# EAGLE board M0_Express_eh_shield (EAGLE 9.1.3)
REV: G
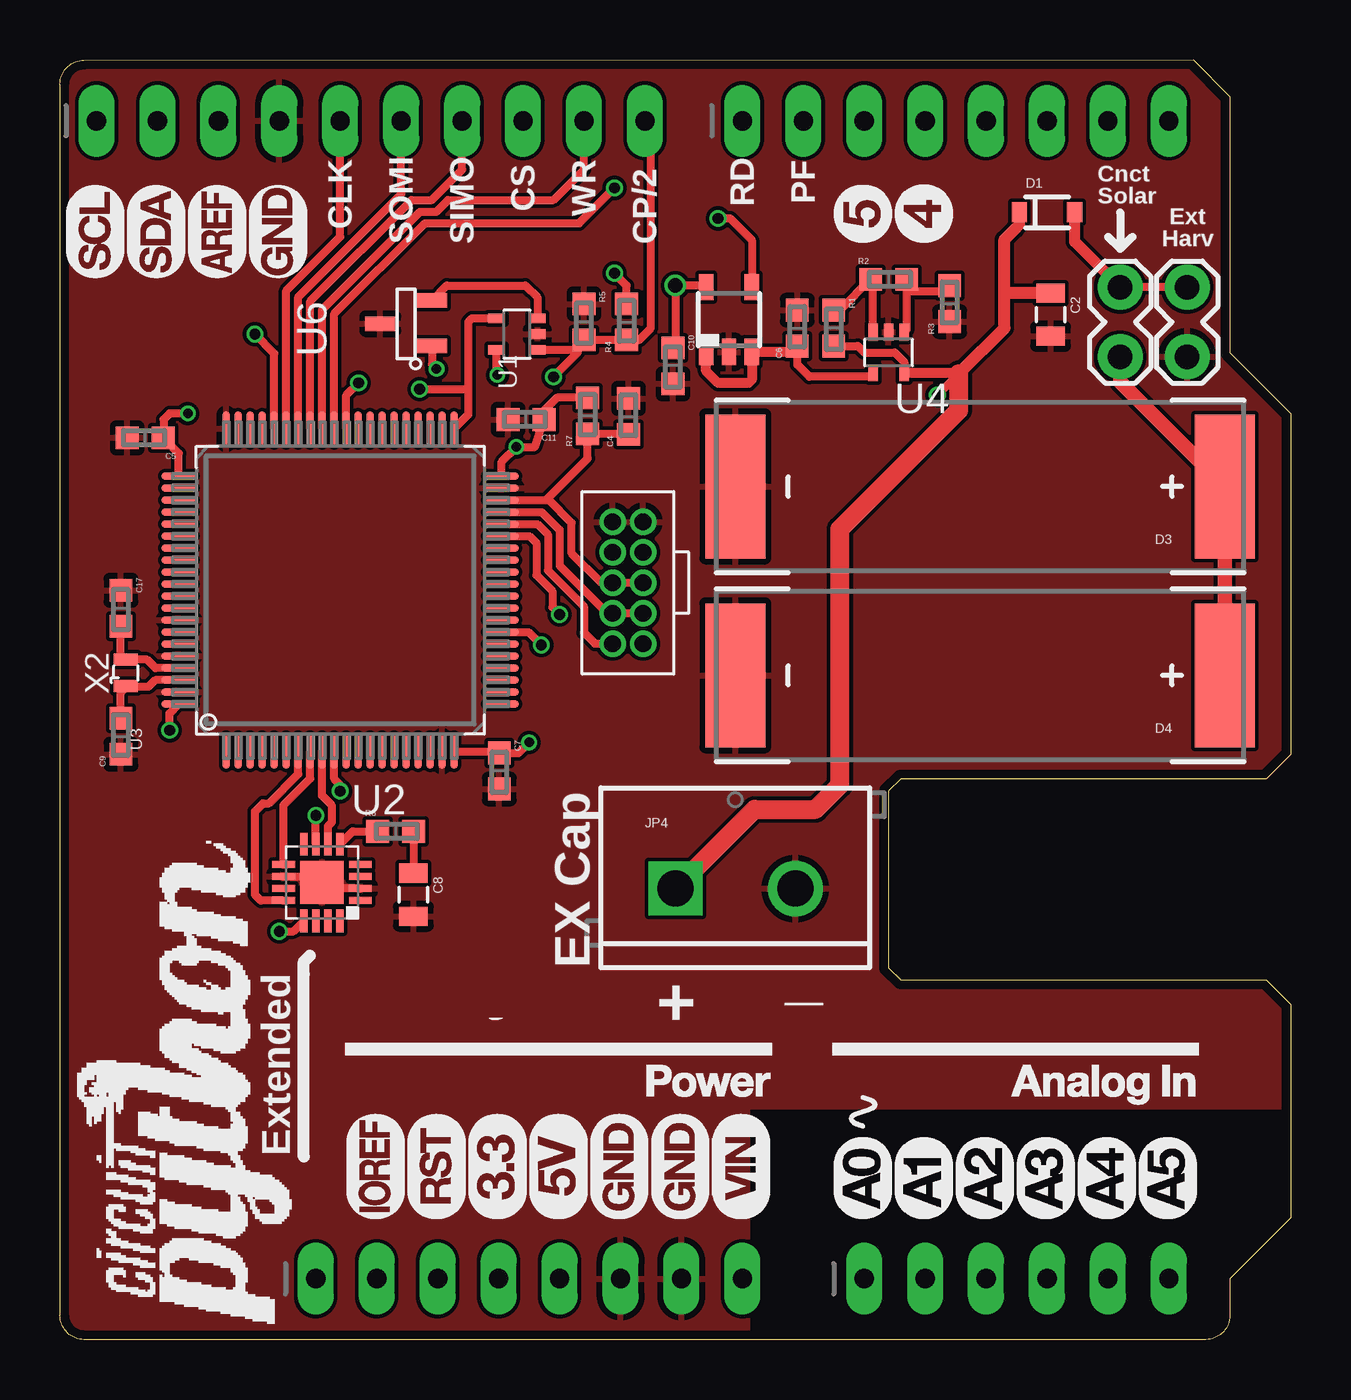
[diagram p0: board, top side]
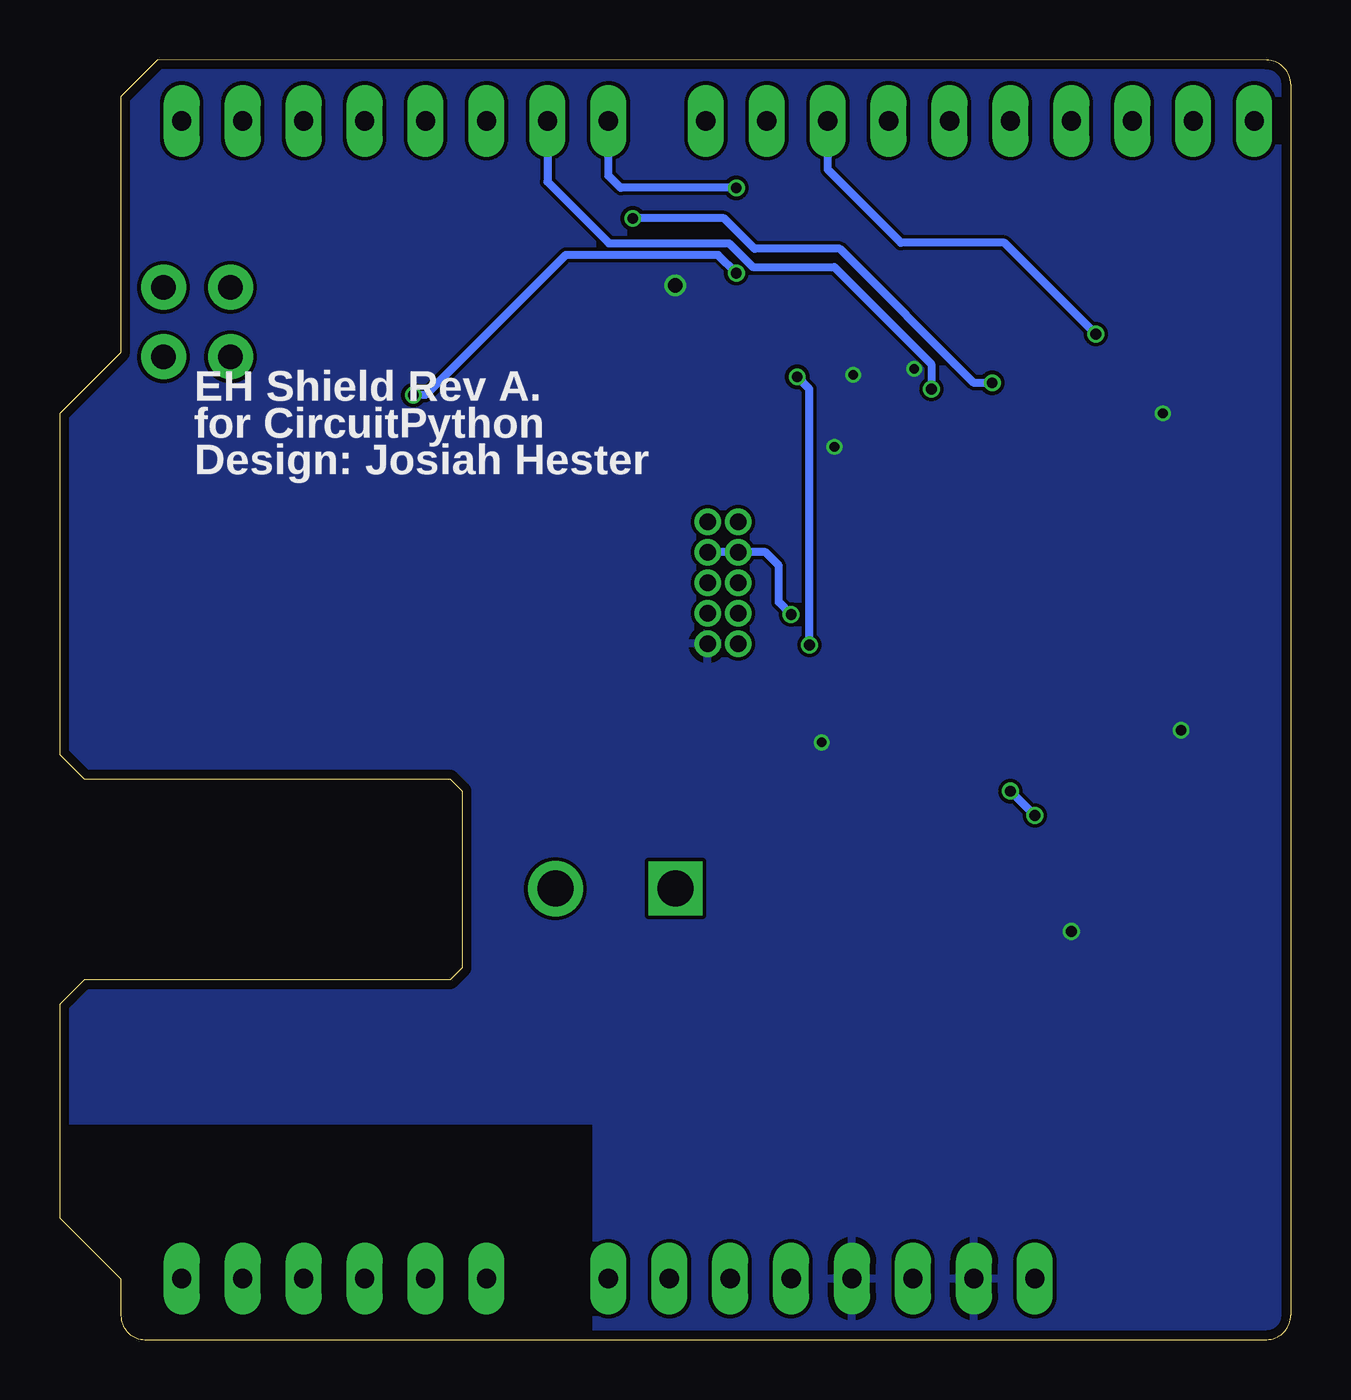
[diagram p1: board, bottom side, seen from below]

Size 51.31 x 53.34 mm. Coordinates in mm from the lower left corner, seen from the top.
Outline: 47.24,53.34 48.77,51.82 48.77,41.15 51.31,38.61 51.31,24.38 50.29,23.37 35.05,23.37 34.54,22.86 34.54,15.75 34.54,15.49 35.05,14.99 50.04,14.99 50.29,14.99 51.31,13.97 51.31,13.72 51.31,5.08 48.77,2.54 48.77,1 arc-90 47.77,0 1,0 arc-90 0,1.02 0,52.32 arc-90 1,53.32 47.24,53.34
Copper layers (1*16): Top 0.035559375mm / dielectric 1.6mm / Bottom 0.035559375mm
Design rules "oshpark-2layer": minimum track width 6mil, minimum drill 10mil, track to track 6mil, track to pad 6mil, pad to pad 6mil, via to via 6mil, smd to smd 6mil, copper to edge 15mil, drill to drill 6mil, minimum pad ring 5mil, minimum via ring 5mil, stop-mask expansion 2.5mil, vias tented up to drill 0mil, thermal gap 10mil
Net classes: 0 default: width 0.33 mm, drill 0.33 mm, clearance 0.152 mm

## Footprints (pad centres in the part's own frame; a part is rotated, then mirrored left to right if it is on the bottom)
0805 = smd 0.8 x 1.2: 1 -0.9,0; 2 0.9,0
0603 = smd 0.95 x 0.95: 1 -0.75,0; 2 0.75,0
SOD-323 = smd 0.63 x 0.83: A 1.15,0; C -1.15,0
SOLARBIT-12X1 = smd 2.5 x 6: + -10.2,0; - 10.2,0
1X02_LOCK = drill 1.016 pad 1.88: 1 -0.178,0; 2 2.718,0
2X5_1.27MM = drill 0.7 pad 1.1: 1 0,0; 2 1.27,0; 3 0,-1.27; 4 1.27,-1.27; 5 0,-2.54; 6 1.27,-2.54; 7 0,-3.81; 8 1.27,-3.81; 9 0,-5.08; 10 1.27,-5.08
SCREWTERMINAL-5MM-2 = drill 1.5 pad 2.232 square: 1 0,0 | drill 1.5 pad 2.3: 2 5,0
1X06_OVALWAVE = drill 0.8 pad 1.5 long: 1 -6.35,0; 2 -3.81,0; 3 -1.27,0; 4 1.27,0; 5 3.81,0; 6 6.35,0
1X10_OVALWAVE = drill 0.8 pad 1.5 long: 1 -11.43,0; 2 -8.89,0; 3 -6.35,0; 4 -3.81,0; 5 -1.27,0; 6 1.27,0; 7 3.81,0; 8 6.35,0; 9 8.89,0; 10 11.43,0
1X08_OVALWAVE = drill 0.8 pad 1.5 long: 1 -8.89,0; 2 -6.35,0; 3 -3.81,0; 4 -1.27,0; 5 1.27,0; 6 3.81,0; 7 6.35,0; 8 8.89,0
SC70-5 = smd 0.4 x 0.7: 1 -0.65,-0.85; 2 0,-0.85; 3 0.65,-0.85; 4 0.65,0.85; 5 -0.65,0.85
QFN16 = smd 0.95 x 0.3: 1 -1.6,0.75; 2 -1.6,0.25; 3 -1.6,-0.25; 4 -1.6,-0.75; 9 1.6,-0.75; 10 1.6,-0.25; 11 1.6,0.25; 12 1.6,0.75 | smd 0.3 x 0.95: 5 -0.75,-1.6; 6 -0.25,-1.6; 7 0.25,-1.6; 8 0.75,-1.6; 13 0.75,1.6; 14 0.25,1.6; 15 -0.25,1.6; 16 -0.75,1.6 | smd 1.8 x 1.8: TH 0,0
PN0080A_N = smd 1.448 x 0.305: 1 -6.725,4.75; 2 -6.725,4.25; 3 -6.725,3.75; 4 -6.725,3.25; 5 -6.725,2.75; 6 -6.725,2.25; 7 -6.725,1.75; 8 -6.725,1.25; 9 -6.725,0.75; 10 -6.725,0.25; 11 -6.725,-0.25; 12 -6.725,-0.75; 13 -6.725,-1.25; 14 -6.725,-1.75; 15 -6.725,-2.25; 16 -6.725,-2.75; 17 -6.725,-3.25; 18 -6.725,-3.75; 19 -6.725,-4.25; 20 -6.725,-4.75; 41 6.725,-4.75; 42 6.725,-4.25; 43 6.725,-3.75; 44 6.725,-3.25; 45 6.725,-2.75; 46 6.725,-2.25; 47 6.725,-1.75; 48 6.725,-1.25; 49 6.725,-0.75; 50 6.725,-0.25; 51 6.725,0.25; 52 6.725,0.75; 53 6.725,1.25; 54 6.725,1.75; 55 6.725,2.25; 56 6.725,2.75; 57 6.725,3.25; 58 6.725,3.75; 59 6.725,4.25; 60 6.725,4.75 | smd 0.305 x 1.448: 21 -4.75,-6.725; 22 -4.25,-6.725; 23 -3.75,-6.725; 24 -3.25,-6.725; 25 -2.75,-6.725; 26 -2.25,-6.725; 27 -1.75,-6.725; 28 -1.25,-6.725; 29 -0.75,-6.725; 30 -0.25,-6.725; 31 0.25,-6.725; 32 0.75,-6.725; 33 1.25,-6.725; 34 1.75,-6.725; 35 2.25,-6.725; 36 2.75,-6.725; 37 3.25,-6.725; 38 3.75,-6.725; 39 4.25,-6.725; 40 4.75,-6.725; 61 4.75,6.725; 62 4.25,6.725; 63 3.75,6.725; 64 3.25,6.725; 65 2.75,6.725; 66 2.25,6.725; 67 1.75,6.725; 68 1.25,6.725; 69 0.75,6.725; 70 0.25,6.725; 71 -0.25,6.725; 72 -0.75,6.725; 73 -1.25,6.725; 74 -1.75,6.725; 75 -2.25,6.725; 76 -2.75,6.725; 77 -3.25,6.725; 78 -3.75,6.725; 79 -4.25,6.725; 80 -4.75,6.725
DCK_R-PDSO-G5 = smd 0.6 x 1.1: 1 -0.95,-1.35; 2 0,-1.35; 3 0.95,-1.35; 4 0.95,1.35; 5 -0.95,1.35
SOT-23 = smd 0.6 x 1.25: 1 -0.95,-1.075; 2 0.95,-1.075; 3 -0.025,1.075
ABS05 = smd 0.5 x 1: A -0.55,0; B 0.55,0

## Placement (x,y rotation side)
C2  10u  [0805]  41.3,42.72 270 top
C4  2.2nF  [0603]  23.7,38.48 90 top
C5  0.1u  [0603]  3.56,37.59 180 top
C6  0.1u  [0603]  30.73,42.16 90 top
C7  0.1u  [0603]  18.31,23.7 270 top
C8  10uF  [0805]  14.73,18.54 270 top
C9  12pF  [0603]  2.54,25.15 90 top
C10  0.1u  [0603]  25.55,40.59 270 top
C11  0.1u  [0603]  19.43,38.35 180 top
C17  12pF  [0603]  2.54,30.48 270 top
D1  BAT20JFILM  [SOD-323]  41.15,46.99 0 top
D3  SOLAR-IXYS-  [SOLARBIT-12X1]  38.35,35.56 180 top
D4  SOLAR-IXYS-  [SOLARBIT-12X1]  38.35,27.69 180 top
JP1  [1X02_LOCK]  46.99,41.15 90 top
JP2  [2X5_1.27MM]  24.31,29.01 180 top
JP3  [1X02_LOCK]  44.2,41.15 90 top
JP4  [SCREWTERMINAL-5MM-2]  25.65,18.8 0 top
JP_AD  20609  [1X06_OVALWAVE]  39.88,2.54 0 top
JP_IOH  20611  [1X10_OVALWAVE]  12.95,50.8 0 top
JP_IOL  20610  [1X08_OVALWAVE]  37.34,50.8 0 top
JP_POWER  20610  [1X08_OVALWAVE]  19.56,2.54 0 top
R1  698k  [0603]  32.26,42.16 270 top
R2  619k  [0603]  34.54,44.2 0 top
R3  681k  [0603]  37.08,43.18 90 top
R4  2.2M  [0603]  23.62,42.42 90 top
R5  2.87M  [0603]  21.84,42.42 270 top
R6  1.5k  [0603]  14,21.18 0 top
R7  47k  [0603]  22,38.51 90 top
U1  TLV3691  [SC70-5]  19.05,41.91 90 top
U2  AB0815  [QFN16]  10.92,19.05 180 top
U3  Value  [PN0080A_N]  11.68,31.24 90 top
U4  MIC841  [SC70-5]  34.54,41.15 180 top
U5  TPS781  [DCK_R-PDSO-G5]  27.89,42.52 0 top
U6  ISL21080  [SOT-23]  14.43,42.37 90 top
U$1  LOGO  [CIRCUITPYTHON-LOGO]  10.41,0.51 90 top
X2  ABS05-32.768KHZ-9-T  [ABS05]  2.74,27.79 90 top

## Library data of the parts
C2 C8 = SparkFun-Capacitors; DIGIKEY: 1276-6456-1-ND
C4 = tiny_passives; DIGIKEY: 478-1219-1-ND; MPN: 06035C222KAT2A
C5-C7 C10 C11 = tiny_passives; DIGIKEY: 1276-1005-1-ND; MPN: CL10B104KO8NNNC
C9 C17 = tiny_passives; DIGIKEY: 1276-1254-1-ND; MPN: CL10C120JB8NNNC
D1 = SparkFun-DiscreteSemi; DIGIKEY: NSR0530HT1GOSCT-ND; PROD_ID: DIO-11623
D3 D4 = SparkFun-Sensors; DIGIKEY: KXOB25-02X8F-ND; MPN: KXOB25-02X8F
JP1 JP3 = SparkFun-Connectors
JP2 = SparkFun-Connectors; DIGIKEY: 1175-1627-ND; MPN: 3220-10-0100-00
JP4 = SparkFun-Connectors; STOREFRONT_ID: PRT-08432
JP_AD JP_IOH JP_IOL JP_POWER = microbuilder
R1 = tiny_passives; DIGIKEY: 311-698KHRCT-ND; MPN: RC0603FR-07698KL
R2 = tiny_passives; DIGIKEY: 311-619KHRCT-ND; MPN: RC0603FR-07619KL
R3 = tiny_passives; DIGIKEY: RMCF0603FT681KCT-ND; MPN: RMCF0603FT681K
R4 = tiny_passives; DIGIKEY: YAG3329CT-ND; MPN: RC0603FR-072M2L
R5 = tiny_passives; DIGIKEY: RMCF0603FT2M87CT-ND; MPN: RMCF0603FT2M87
R6 = tiny_passives; DIGIKEY: A121524CT-ND; MPN: CRG0603F1K5
R7 = tiny_passives; DIGIKEY: 541-4061-1-ND; MPN: CRCW060347K0JNEAC
U1 = tlv3691; DIGIKEY: 296-37910-1-ND; MPN: TLV3691IDCKR
U2 = AB08XX; DIGIKEY: 535-11930-1-ND; MPN: AB0815-T3
U3 = msp430fr5994; DIGIKEY: 296-45561-1-ND; MANUFACTURER: Texas Instruments; PARTNUMBER: MSP430FR5994IPNR; REFDES: RefDes; TYPE: TYPE
U4 = fedpower; DIGIKEY: 576-2923-1-ND; MPN: MIC841HYC5-TR
U5 = ti-regulator; DIGIKEY: 296-29966-1-ND
U6 = isl21080; DIGIKEY: ISL21080DIH312Z-TKTR-ND; MPN: ISL21080DIH312Z-TK
U$1 = circuitpython-logo
X2 = abs05; DIGIKEY: 535-11897-1-ND; MPN: ABS05-32.768KHZ-9-T

## Nets
!RESET: JP_POWER.3
A0: JP_AD.1
A1: JP_AD.2
A2: JP_AD.3
A3: JP_AD.4
AREF [aref]: JP_IOH.3
D0: JP_IOL.8
D1: JP_IOL.7
D2: JP_IOL.6
D3: JP_IOL.5
D4: JP_IOL.4
D5: JP_IOL.3
GND [gnd]: C2.2 C4.2 C5.2 C6.2 C7.2 C8.2 C9.1 C10.2 C11.2 C17.1 D3.- D4.- JP1.1 JP2.9 JP2.10 JP4.2 JP_IOH.4 JP_POWER.6 JP_POWER.7 R3.1 R5.1 U1.2 U2.2 U2.10 U2.TH U3.19 U3.39 U3.60 U3.73 U3.76 U3.79 U4.2 U5.2 U6.3
MSP430_RST: C4.1 JP2.5 JP2.6 R7.1 U3.38
MSP430_TEST: JP2.3 JP2.4 U3.37
N$1: D1.A JP1.2 JP3.2
N$2: R1.1 R2.1 U4.3
N$3: R2.2 R3.2 U4.1
N$4: R6.1 U2.5
N$5: C17.2 U3.77 X2.B
N$6: C9.2 U3.78 X2.A
N$7: C6.1 U4.4 U5.1 U5.3
N$8: C8.1 R6.2
N$10: D3.+ D4.+ JP3.1
NV_CLK: JP_IOH.5 U3.55
NV_CS: JP_IOH.8 U3.56
NV_READ: JP_IOL.1 U3.51
NV_SIMO: JP_IOH.7 U3.53
NV_SOMI: JP_IOH.6 U3.54
NV_WRITE: JP_IOH.9 U3.52
PFAIL: JP_IOL.2 U1.4 U3.41
REG_SET: U3.50 U5.4
RTC_CE: U2.12 U3.7
RTC_SCLK: U2.7 U3.10
RTC_SIMO: U2.9 U3.8
RTC_SOMI: U2.6 U3.9
RX_DEBUG: JP2.2 U3.36
SCL: JP_IOH.1
SDA: JP_IOH.2
TX_DEBUG: JP2.7 JP2.8 U3.35
VCAP: C2.1 D1.C JP4.1 R1.2 R4.2 U4.5
VCAP_HALF: JP_IOH.10 R4.1 R5.2 U1.1 U3.27
VCC: C5.1 C7.1 C10.1 C11.1 JP2.1 JP_POWER.2 JP_POWER.4 R7.2 U1.5 U2.13 U3.20 U3.40 U3.61 U3.80 U5.5 U6.1
VIN [USB]: JP_POWER.8
VREF: U1.3 U6.2

## Tracks (layer width: path | path; a pad name or v marks a point on that pad's centre or on a via)
GND
  Top 0.33: U2.10 10.67,19.3 U2.TH 11.18,18.8 11.43,18.8 U2.2
  pour Top: -0.25,53.59 53.85,53.59 53.85,11.68 51.82,9.65 28.7,9.65 28.7,-0.76 -1.27,-0.76 -1.27,53.59
MSP430_RST
  Top 0.33: U3.38 20.26,34.99 | 20.26,34.99 22,36.73 R7.1 23.67,37.76 C4.1 | 20.26,34.99 20.38,34.99 21.34,34.04 21.34,32.77 22.55,31.55 JP2.6 JP2.5
MSP430_TEST
  Top 0.33: JP2.3 JP2.4 22.81,30.28 20.83,32.26 20.83,33.75 20.08,34.49 U3.37
N$1
  Top 0.33: JP1.2 JP3.2
  Top 0.45: JP3.2 42.3,45.76 D1.A
N$2
  Top 0.34: R1.1 32.51,42.91 R2.1 33.89,44.1 U4.3
N$3
  Top 0.34: R3.2 36.84,43.69 35.31,43.69 | U4.1 35.31,42.11 35.31,43.69 | 35.31,43.69 R2.2
N$4
  Top 0.33: U2.5 12.21,21.18 R6.1
N$5
  Top 0.33: U3.77 3.99,27.99 3.63,28.35 2.75,28.35 X2.B 2.54,28.54 C17.2
N$6
  Top 0.33: U3.78 3.97,27.49 3.68,27.2 2.78,27.2 | 2.78,27.2 X2.A | C9.2 2.54,26.97 2.78,27.2
N$7
  Top 0.33: U4.4 33.73,40.13 31.24,40.13 30.73,40.64 C6.1
  Top 0.406: C6.1 30.49,41.17 U5.3 28.84,40.02 28.7,39.88 27.43,39.88 26.94,40.37 U5.1
N$8
  Top 0.33: R6.2 14.73,21.17 C8.1
N$10
  Top 0.61: JP3.1 44.2,39.92 D3.+ D4.+
NV_CLK
  Top 0.33: U3.55 9.43,43.72 11.68,45.97 JP_IOH.5
NV_CS  (via drill 0.45)
  Top 0.33: U3.56 8.93,41.1 v8.13,41.91
  Bottom 0.33: v8.13,41.91 11.94,45.72 16.26,45.72 19.3,48.77 JP_IOH.8
NV_READ  (via drill 0.45)
  Top 0.33: U3.51 11.43,42.76 15.21,46.53 21.64,46.53 v23.11,48.01
  Bottom 0.33: v23.11,48.01 27.94,48.01 28.45,48.51 JP_IOL.1
NV_SIMO
  Top 0.33: U3.53 10.43,43.28 14.65,47.5 15.49,47.5 16.76,48.77 JP_IOH.7
NV_SOMI
  Top 0.33: U3.54 9.93,43.46 14.22,47.75 JP_IOH.6
NV_WRITE
  Top 0.33: U3.52 10.93,42.94 15.01,47.02 15.69,47.02 16.18,47.5 20.57,47.5 21.84,48.77 JP_IOH.9
PFAIL  (via drill 0.45)
  Top 0.33: U1.4 17.16,42.56 17.02,42.42 17.02,39.62 | U3.41 17.02,38.55 17.02,39.62 | v14.99,39.62 17.02,39.62
  Bottom 0.33: JP_IOL.2 30.99,48.26 28.42,45.7 23.41,45.7 22.42,44.7 19.03,44.7 14.99,40.66 v14.99,39.62
REG_SET  (via drill 0.45)
  Top 0.33: U3.50 11.93,39.37 v12.45,39.88 | v27.43,46.74 27.94,46.74 28.84,45.84 U5.4
  Bottom 0.33: v12.45,39.88 13.21,39.88 18.8,45.47 22.35,45.47 23.62,46.74 v27.43,46.74
RTC_CE
  Top 0.33: U2.12 8.37,18.3 8.13,18.54 8.13,22.02 8.46,22.35 8.72,22.35 9.93,23.57 U3.7
RTC_SCLK  (via drill 0.45)
  Top 0.33: U2.7 v10.67,21.84 | v11.68,22.86 11.68,23.11 11.43,23.37 U3.10
  Bottom 0.33: v10.67,21.84 v11.68,22.86
RTC_SIMO
  Top 0.33: U2.9 9.32,22.28 10.43,23.39 U3.8
RTC_SOMI
  Top 0.33: U2.6 11.17,21.4 11.34,21.57 11.34,22.26 10.92,22.68 10.92,24.51 U3.9
RX_DEBUG
  Top 0.33: U3.36 19.9,33.99 20.34,33.55 20.34,32.06 21.84,30.56 21.84,29.46 22.3,29.01 JP2.2
TX_DEBUG  (via drill 0.45)
  Top 0.33: v20.83,30.23 20.53,30.53 20.53,31.2 19.86,31.86 19.86,33.2 19.57,33.49 U3.35
  Bottom 0.33: v20.83,30.23 21.34,30.73 21.34,32.26 21.89,32.82 JP2.8 JP2.7
VCAP  (via drill 0.45)
  Top 0.33: R1.2 33.26,41.41 33.53,41.15 34.8,41.15 35.19,40.75 U4.5 | R4.2 23.62,43.94 v23.11,44.45 | v36.58,39.37 37.47,40.26 37.5,40.3 | D1.C 40,46.48
  Top 0.406: U4.5 37.5,40.3
  Top 0.45: 40,46.48 39.81,46.29 39.55,46.04
  Top 0.5: 37.5,40.3 39.37,42.16 39.37,43.69 | 39.37,43.69 39.37,45.85 39.81,46.29 | C2.1 39.44,43.62 39.37,43.69
  Top 0.8: JP4.1 28.96,22.1 31.5,22.1 32.51,23.11 32.51,33.78 37.47,38.73 37.47,40.26
  Bottom 0.33: v36.58,39.37 36.07,39.37 30.23,45.21 23.88,45.21 v23.11,44.45
VCAP_HALF  (via drill 0.45)
  Top 0.33: U1.1 21.44,41.26 21.58,41.41 | 21.58,41.41 R5.2 R4.1 24.14,41.67 24.64,42.16 24.64,50.55 JP_IOH.10 | U3.27 19.53,29.49 v20.07,28.96 | v20.57,40.13 21.58,41.14 21.58,41.41
  Bottom 0.33: v20.07,28.96 20.07,39.62 v20.57,40.13
VCC  (via drill 0.4, 0.45, 0.6)
  Top 0.33: U5.5 26.87,43.94 v25.65,43.94 25.65,41.44 C10.1 | v18.24,40.21 18.2,40.24 U1.5 | U6.1 15.5,40.66 v15.7,40.46 | R7.2 20.71,39.26 20.18,38.72 C11.1 19.8,37.21 v19.02,37.21 18.41,36.59 U3.40 | U3.61 4.96,36.94 4.44,37.46 | 4.44,37.46 C5.1 | v5.33,38.61 4.57,38.61 4.32,38.35 4.32,37.58 4.44,37.46 | U3.20 18.24,24.52 C7.1 19.11,24.45 v19.56,24.89 | v4.57,25.4 4.57,26.11 U3.80 | v9.14,17.02 9.74,17.02 U2.13
  pour Bottom: -0.76,54.36 52.07,54.36 52.07,9.14 28.96,9.14 28.96,-0.76 -0.25,-0.76 -0.76,-0.76
VREF
  Top 0.33: U6.2 16.13,43.94 19.41,43.94 19.9,43.45 U1.3

## Text on the board
tPlace: CS | WR | RD | PF | CLK | SOMI | SIMO | CP/2 | Cnct / Solar | Ext / Harv | EX Cap | _ | + | Extended
bPlace: EH Shield Rev A. / for CircuitPython / Design: Josiah Hester
214bmp: D:/SmartProjects/Snc/a4_bn_logo2.bmp